# Altium PCB PCB2.PcbDoc
Units mm, origin at the board's own origin, x right, y up, seen from the top; angles counter-clockwise.
Board outline 72.14 x 54.61 mm, 2 copper layers (Top Layer, Bottom Layer); 36 components, 33 nets, 111 pads, 121 vias.
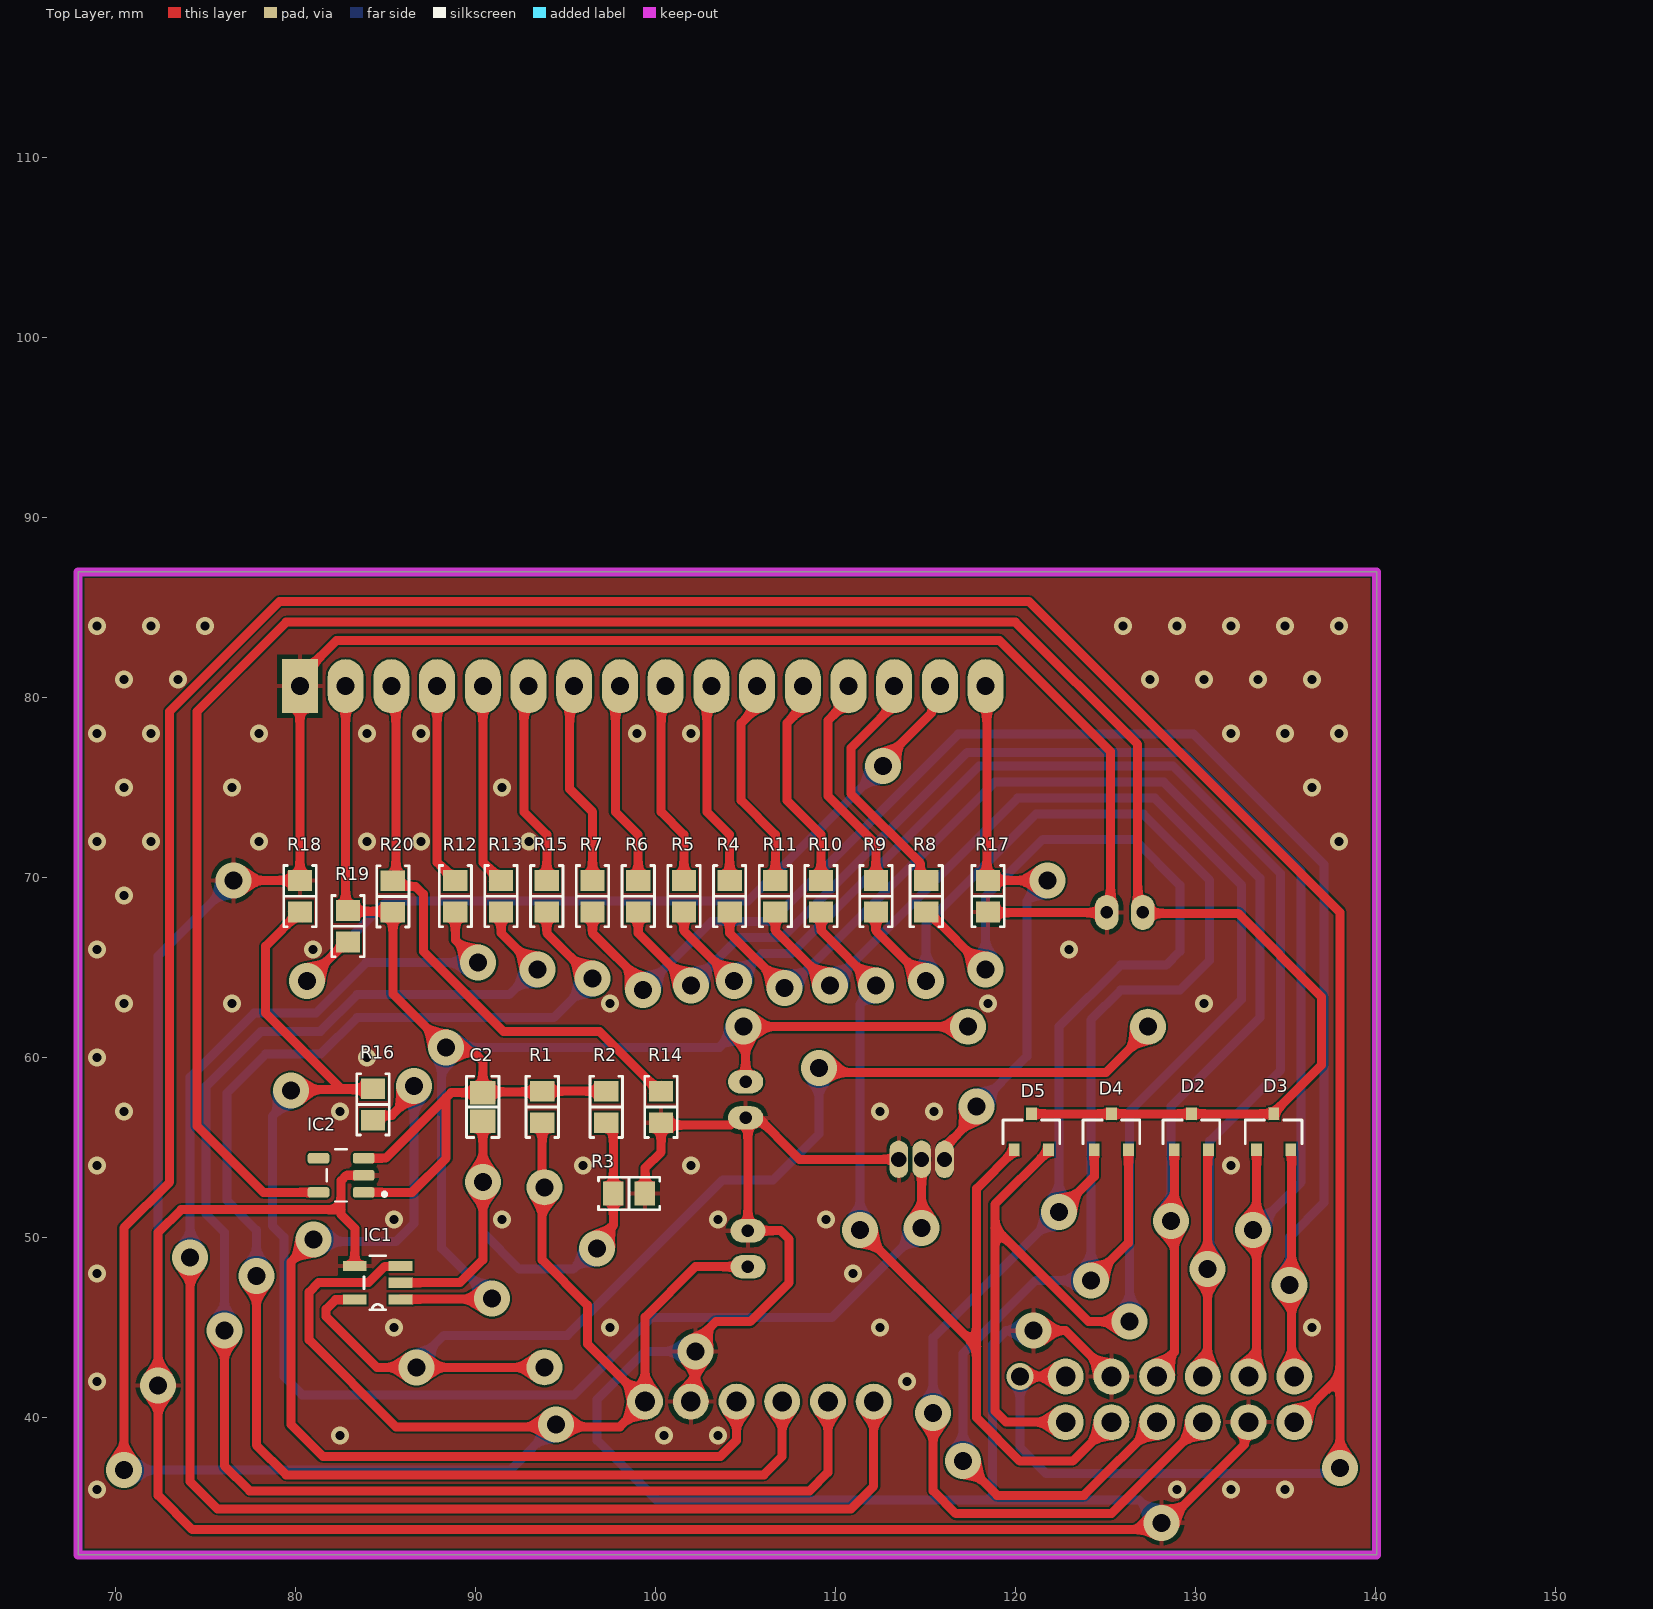
[diagram p0: Top Layer view]
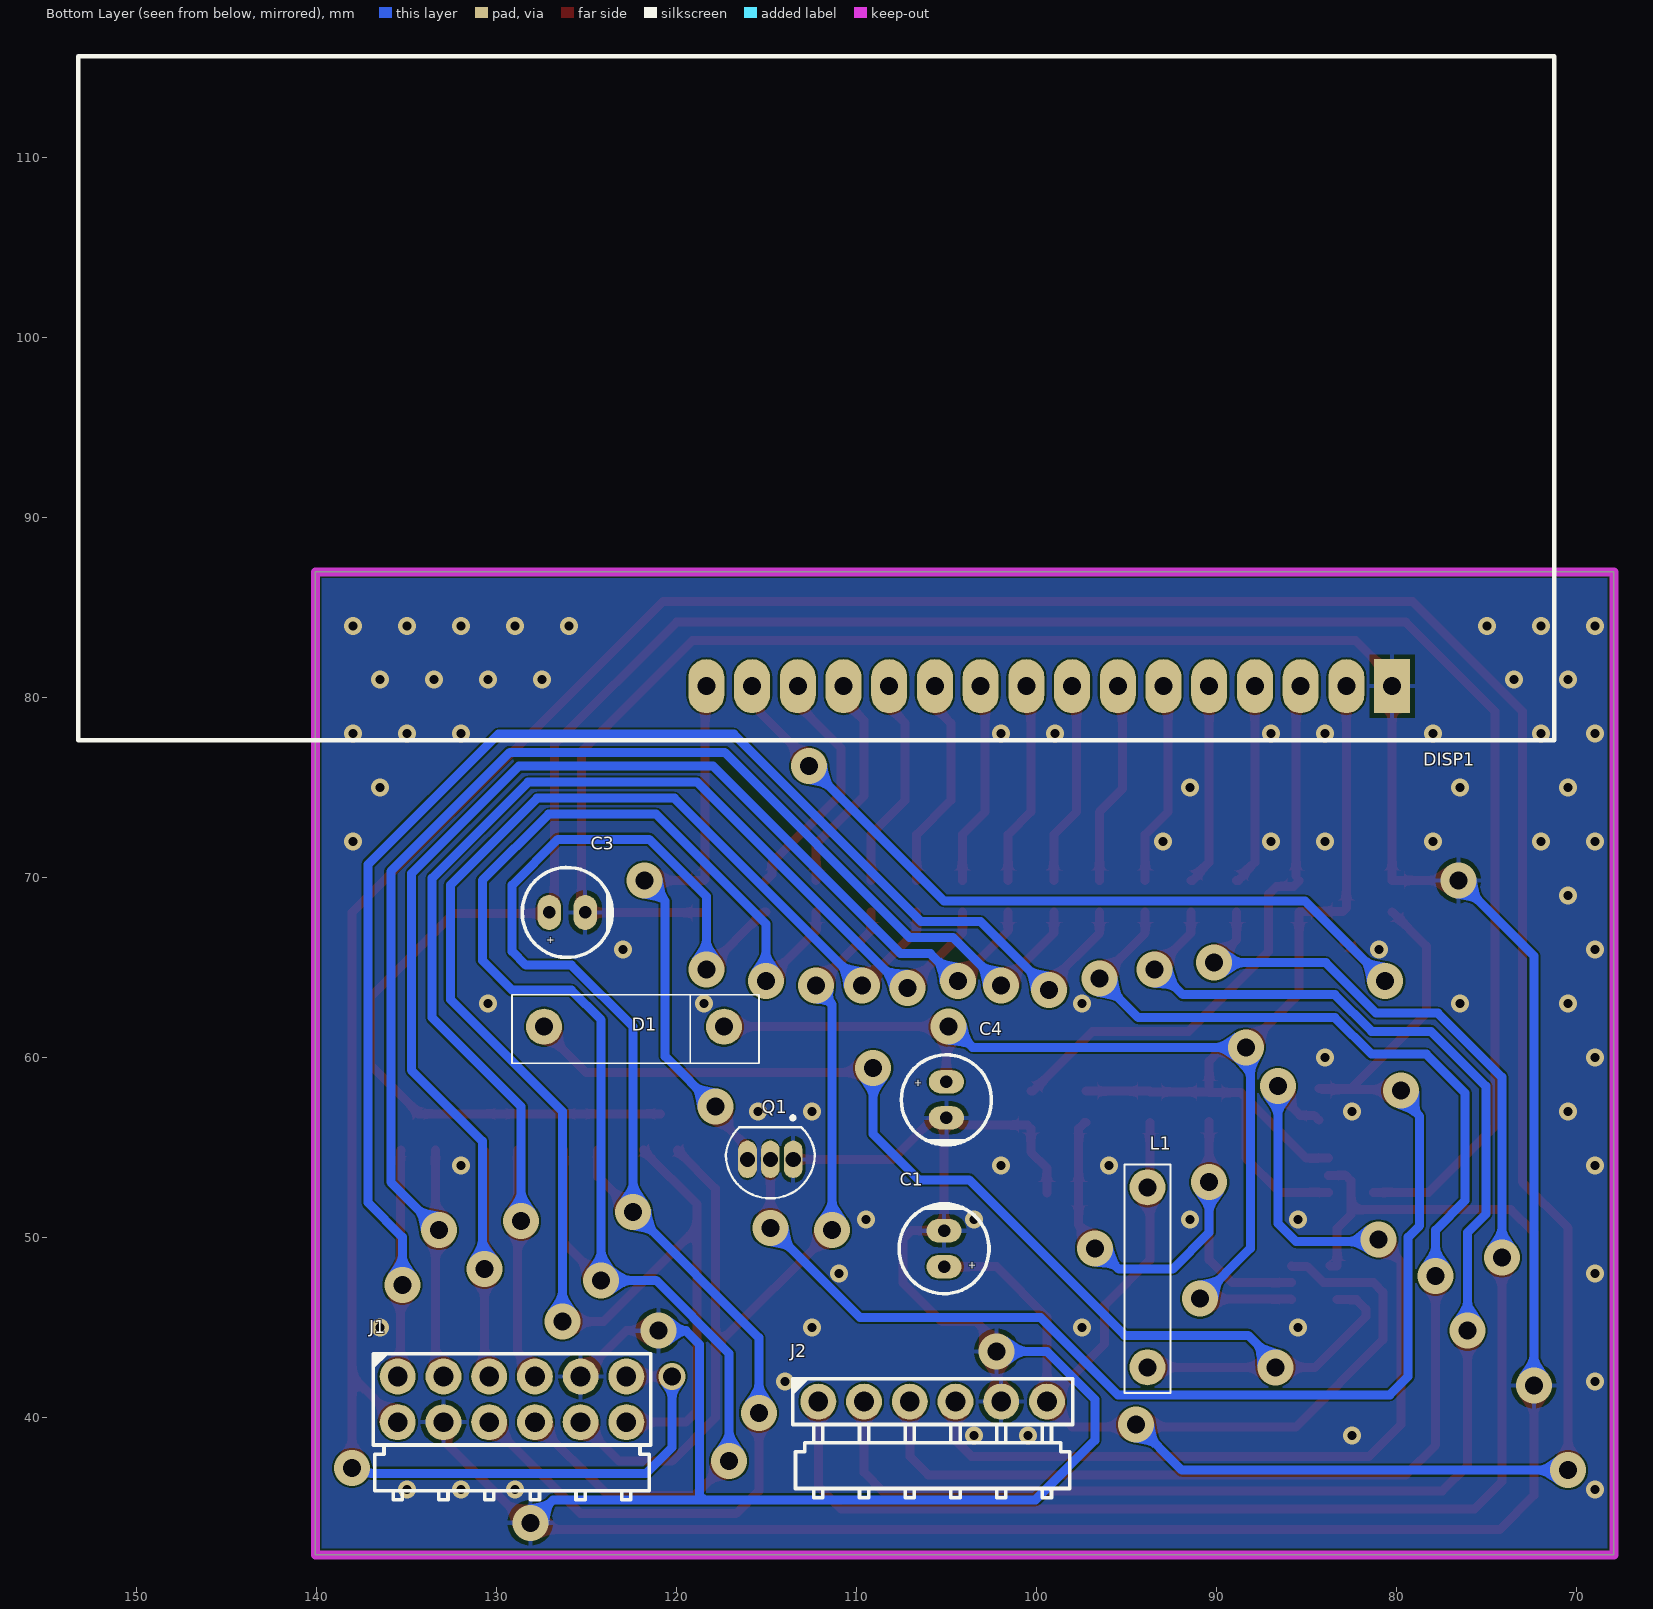
[diagram p1: Bottom Layer view, seen from below]
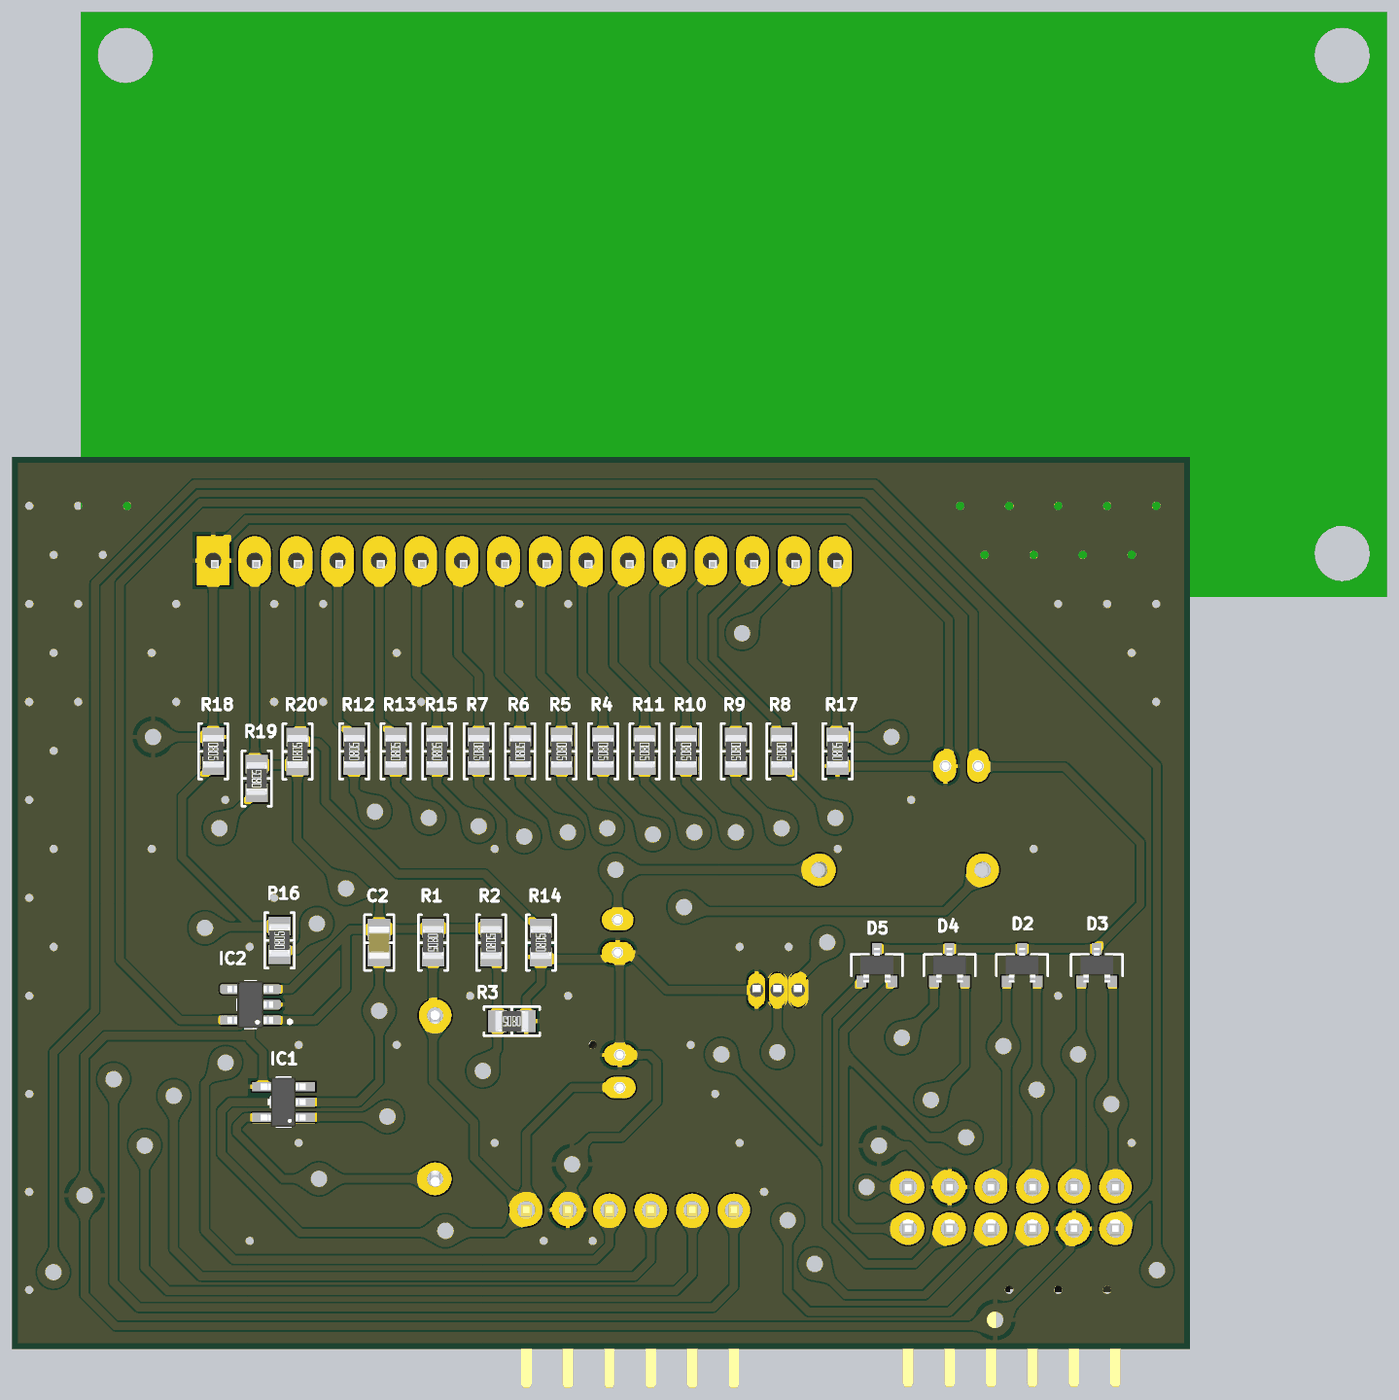
[diagram p2: 3D render of the assembled board from above, using the file's embedded part models]
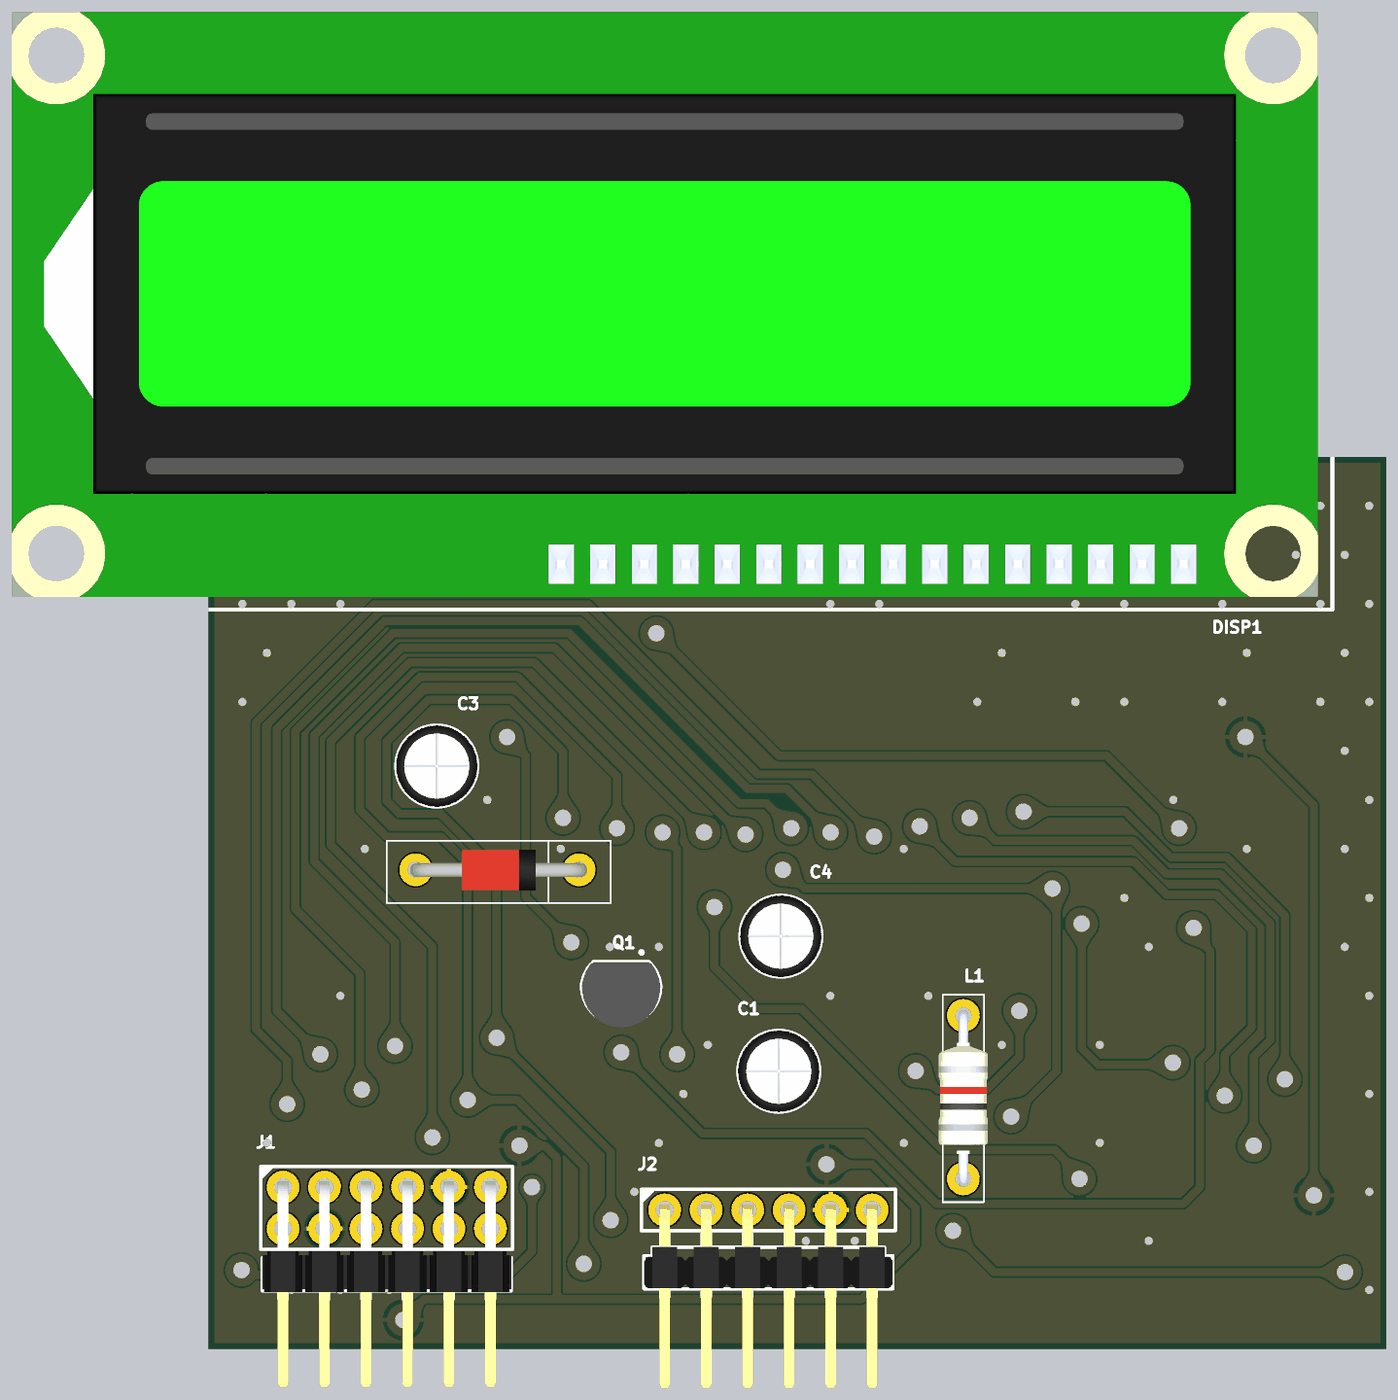
[diagram p3: 3D render of the assembled board from below, using the file's embedded part models]

## Layer stack, top to bottom
Top Solder: solder mask 0.0102, Solder Resist, Dk 3.5
Top Layer: signal copper 0.0356
Dielectric 1: dielectric 0.32, FR-4, Dk 4.8
Bottom Layer: signal copper 0.0356
Bottom Solder: solder mask 0.0102, Solder Resist, Dk 3.5

## Board outline
67.945,32.385 67.945,86.995 140.081,86.995 140.081,32.385

## Design rules (kind name [scope] priority, off if disabled: settings)
Clearance [All] p1: gap=0.1 ignorepadtopadclearanceinfootprint=FALSE
HoleToHoleClearance [All] p1: gap=0.1 allowstackedmicrovias=TRUE
MinimumSolderMaskSliver [All] p1: minsoldermaskwidth=0.067
PolygonConnect [All] p1: connectstyle=Relief reliefconductorwidth=0.254 reliefentries=4 polygonreliefangle="90 Angle" airgapwidth=0.254
RoutingVias [All] p1: holewidth=1 width=2 viastyle="Through Hole" minholewidth=0.5 minwidth=0.3 maxholewidth=1 maxwidth=2
SilkToSolderMaskClearance [IsPad] p1: minsilkscreentomaskgap=0.075 clearancetoexposedcopper=TRUE
SolderMaskExpansion [All] p1: expansion=0.102 istentingtop=FALSE
Width [All] p1: maxlimit=1 minlimit=0.254 preferedwidth=0.5
27 further rules are at their usual default settings.

## Components (designator, comment, footprint, x,y, rotation, side; value= is the part's Value field where it differs from the comment)
C1 "10µF" "CAP TH ALUM ELEC D5.00mm S2.00mm H11.00mm" 105.156,49.387 r270 bottom
C2 "12 pF" "CAP 0805_2012" 90.424,57.263 r90 top
C3 "4.7uF" "CAP TH ALUM ELEC D5.00mm S2.00mm H11.00mm" 126.095,68.072 r0 bottom value=10µF
C4 "4.7uF" "CAP TH ALUM ELEC D5.00mm S2.00mm H11.00mm" 105.029,57.658 r90 bottom value=10µF
D1 "ZenerD" ZENERD 127.381,61.722 r180 bottom
D2 "BAT54C" BAT54C 129.794,55.88 r0 top
D3 "BAT54C" BAT54C 134.366,55.88 r0 top
D4 "BAT54C" BAT54C 125.349,55.88 r0 top
D5 "BAT54C" BAT54C 120.904,55.88 r0 top
DISP1 "2x16_LCD" 2X16_LCD 80.264,80.645 r0 bottom
IC1 "NCP1406SNT1G" NCP1406SNT1G 84.582,47.498 r180 top
IC2 "LP2980IM5-3.3" LP2980IM5-3.3 82.55,53.467 r180 top
J1 "M20-9740646" "HARWIN M20-9740645" 129.159,41.021 r180 bottom
J2 "M20-9960645" "HARWIN M20-9960645" 105.791,40.894 r180 bottom
L1 "Inductor 10 uH" INDUCTOR 93.853,52.799 r270 bottom
Q1 "2N3904" 2N3904 114.808,54.356 r0 bottom
R1 "1 Ohms" "RES 0805_2012" 93.726,57.263 r270 top
R2 "620 kOhms" "RES 0805_2012" 97.282,57.263 r90 top
R3 "110 kOhms" "RES 0805_2012" 98.552,52.451 r180 top
R4 "200 Ohms" "RES 0805_2012" 104.14,68.975 r270 top
R5 "200 Ohms" "RES 0805_2012" 101.6,68.975 r270 top
R6 "200 Ohms" "RES 0805_2012" 99.06,68.975 r90 top
R7 "200 Ohms" "RES 0805_2012" 96.52,68.975 r270 top
R8 "200 Ohms" "RES 0805_2012" 115.062,68.975 r270 top
R9 "200 Ohms" "RES 0805_2012" 112.268,68.975 r270 top
R10 "200 Ohms" "RES 0805_2012" 109.22,68.975 r270 top
R11 "200 Ohms" "RES 0805_2012" 106.68,68.975 r270 top
R12 "100 Ohms" "RES 0805_2012" 88.9,68.975 r90 top
R13 "100 Ohms" "RES 0805_2012" 91.44,68.975 r90 top
R14 "100 Ohms" "RES 0805_2012" 100.33,57.263 r90 top
R15 "100 Ohms" "RES 0805_2012" 93.98,68.975 r90 top
R16 "2.2 kOhms" "RES 0805_2012" 84.328,57.404 r90 top
R17 "1 Ohms" "RES 0805_2012" 118.49,68.975 r90 top
R18 "10 kOhms" "RES 0805_2012" 80.264,68.975 r270 top
R19 "10 Ohms" "RES 0805_2012" 82.931,67.31 r90 top
R20 "2.1 kOhms" "RES 0805_2012" 85.428,68.961 r90 top

## Footprints (in the part's own frame and the unit in brackets; to place one, negate y for a bottom-side part, rotate by r counter-clockwise, add the part's x,y. Pads: shape width x height; smd on the part's side, far side on the other; paste and mask are expansions set on the pad)
2N3904 [mm]
  oval 1.04x2.08 hole 0.84: 1(-1.27,0) 2(0,0) 3(1.27,0)
  silkscreen extent -2.48,-2.4 2.48,2.16, body extent -2.4,-1.65 2.4,2.29, height 5.74
2X16_LCD [mm]
  rect 2x3 hole 1: 0(0,0)
  oval 2x3 hole 1: 1(2.54,0) 2(5.08,0) 3(7.62,0) 4(10.16,0) 5(12.7,0) 6(15.24,0) 7(17.78,0) 8(20.32,0) 9(22.86,0) 10(25.4,0) 11(27.94,0) 12(30.48,0) 13(33.02,0) 14(35.56,0) 15(38.1,0)
  silkscreen extent -9,-35 73,3, body extent -8.13,-33.59 71.87,2.21, height 12.4
BAT54C [mm]
  rect 0.6x0.7 smd: 0(-0.95,-1) 1(0.95,-1) 2(0,1)
  silkscreen extent -1.57,-0.65 1.57,0.66, body extent -1,-1.05 1,1.05, height 1.1
"CAP 0805_2012" [mm] "Chip Capacitor, 2-Leads, Body 2.00x1.20mm, IPC Medium Density"
  rect 1.3x1.4 smd: 1(-0.8,0) 2(0.8,0)
  silkscreen extent -1.7,-0.9 1.7,0.9, body extent -1,-0.64 1,0.64, height 1.26
"CAP TH ALUM ELEC D5.00mm S2.00mm H11.00mm" [mm] "5mm Diameter 2mm Lead Spacing Aluminum Electrolytic Capacitors Radial, Can"
  oval 1.3x1.95 hole 0.7: 1(1,0) 2(-1,0)
  silkscreen extent -2.5,-2.5 2.5,2.5, body extent -2.51,-2.5 2.5,2.5, height 11
"HARWIN M20-9740645" [mm] "2.54mm DIL PC TAIL PIN HEADER ASSEMBLY"
  round 2 hole 1.1: 1(-6.35,1.27) 2(-3.81,1.27) 3(-1.27,1.27) 4(1.27,1.27) 5(3.81,1.27) 6(6.35,1.27) 7(6.35,-1.27) 8(3.81,-1.27) 9(1.27,-1.27) 10(-1.27,-1.27) 11(-3.81,-1.27) 12(-6.35,-1.27)
  silkscreen extent -7.73,-5.59 7.71,2.57, body extent -7.62,-10.97 7.62,1.59, height 5
"HARWIN M20-9960645" [mm] "2.54mm DIL PC TAIL PIN HEADER ASSEMBLY"
  round 2 hole 1.1: 1(-6.35,0) 2(-3.81,0) 3(-1.27,0) 4(1.27,0) 5(3.81,0) 6(6.35,0)
  silkscreen extent -7.78,-5.33 7.78,1.3, body extent -7.62,-10.9 7.62,0.32, height 2.54
INDUCTOR [mm]
  round 2 hole 1: 0(0,0) 1(10,0)
  silkscreen extent -1.27,-1.27 11.43,1.27, body extent -0.32,-1.49 10.48,1.5, height 3
LP2980IM5-3.3 [mm]
  rrect50% 1.21x0.59 smd: 1(-1.255,0.95) 2(-1.255,0) 3(-1.255,-0.95) 4(1.255,-0.95) 5(1.255,0.95)
  silkscreen extent -2.51,-1.45 0.8,1.45, body extent -1.4,-1.45 1.4,1.45, height 1.45
NCP1406SNT1G [mil]
  rect 52x22 smd: 1(-50,37) 2(-50,0) 3(-50,-37) 4(50,-37) 5(50,37)
  silkscreen extent -17,-59 30,59, body extent -53,-59 55,59, height 43
"RES 0805_2012" [mm] "Chip Resistor, 2-Leads, Body 2.00x1.25mm, IPC Medium Density"
  rect 1.15x1.35 smd: 1(-0.875,0) 2(0.875,0)
  silkscreen extent -1.7,-0.9 1.7,0.9, body extent -1,-0.62 1,0.63, height 0.6
ZENERD [mm]
  round 2 hole 1: A(0,0) C(10,0)
  silkscreen extent -1.78,-2.03 11.94,1.78, body extent -0.35,-1.27 10.51,1.22, height 2.5

## Part data
C1: library part ECE-A1CN100U, "CAP ALUM 10UF 20% 16V RADIAL", Device Package="Radial, Can", Lifetime @ Temp.="2000 Hrs @ 85°C", Manufacturer="Panasonic Electronic Components", Operating Temperature="-40°C ~ 85°C", Ripple Current @ High Frequency="68mA @ 10kHz", Ripple Current @ Low Frequency="40mA @ 120Hz", Supplier Part Number 1=P1163-ND, Tolerance=±20%, Voltage - Rated=16V, Applications="General Purpose", Capacitance=10µF, ComponentLink1Description=Datasheet, ComponentLink1URL=http://industrial.panasonic.com/www-cgi/jvcr13pz.cgi?E+PZ+3+ABA0097+ECEA1CN100U+7+WW, componentlink2description="DigiKey Link", componentlink2url=http://digikey.com/product-detail/en/panasonic-electronic-components/ECE-A1CN100U/P1163-ND/227604, Height - Seated (Max)="0.433\" (11.00mm)", lastupdated="4.09.2020 23:28:57", Lead Spacing="0.079\" (2.00mm)", Lifecycle Status=Active, Minimum Order=1, Mounting Type="Through Hole", Package / Case="Radial, Can", Packaging=Bulk, Part Number=ECE-A1CN100U, Part Status=Active, partid=21486, Polarization=Bi-Polar, price=0.29, Series=SU, Size / Dimension="0.197\" Dia (5.00mm)", Supplier 1=DigiKey
C2: library part VJ0805A120FXJCW1BC, "CAP CER 12PF 16V C0G/NP0 0805", Device Package="0805 (2012 Metric)", Manufacturer="Vishay Vitramon", Operating Temperature="-55°C ~ 125°C", Supplier Part Number 1=720-VJ0805A120FXJCW1BCCT-ND, Temperature Coefficient="C0G, NP0", Tolerance=±1%, Voltage - Rated=16V, Applications="General Purpose", Capacitance="12 pF", ComponentLink1Description=Datasheet, ComponentLink1URL=https://www.vishay.com/docs/28548/vjw1bcbascomseries.pdf, componentlink2description="DigiKey Link", componentlink2url=https://www.digikey.com/en/products/detail/vishay-vitramon/VJ0805A120FXJCW1BC/8307136, lastupdated="19.09.2022 13:03:27", Lifecycle Status=Active, Minimum Order=1, Mounting Type="Surface Mount, MLCC", Package / Case="0805 (2012 Metric)", Packaging=TapeAndReel, Part Number=VJ0805A120FXJCW1BC, Part Status=Active, partid=31670, price=0.06, Series=VJ, Size / Dimension="0.079\" L x 0.049\" W (2.00mm x 1.25mm)", Supplier 1=DigiKey, Thickness (Max)="0.028\" (0.70mm)"
C3 C4: library part ECE-A1CN100U, "CAP ALUM 4.7UF 20% 16V RADIAL", Capacitance=4.7µF, Device Package="Radial, Can", Lifetime @ Temp.="2000 Hrs @ 85°C", Manufacturer="Panasonic Electronic Components", Operating Temperature="-40°C ~ 85°C", Ripple Current @ High Frequency="68mA @ 10kHz", Ripple Current @ Low Frequency="40mA @ 120Hz", Supplier Part Number 1=P1163-ND, Tolerance=±20%, Voltage - Rated=16V, Applications="General Purpose", ComponentLink1Description=Datasheet, ComponentLink1URL=http://industrial.panasonic.com/www-cgi/jvcr13pz.cgi?E+PZ+3+ABA0097+ECEA1CN100U+7+WW, componentlink2description="DigiKey Link", componentlink2url=http://digikey.com/product-detail/en/panasonic-electronic-components/ECE-A1CN100U/P1163-ND/227604, Height - Seated (Max)="0.433\" (11.00mm)", lastupdated="4.09.2020 23:28:57", Lead Spacing="0.079\" (2.00mm)", Lifecycle Status=Active, Minimum Order=1, Mounting Type="Through Hole", Package / Case="Radial, Can", Packaging=Bulk, Part Number=ECE-A1CN100U, Part Status=Active, partid=21486, Polarization=Bi-Polar, price=0.29, Series=SU, Size / Dimension="0.197\" Dia (5.00mm)", Supplier 1=DigiKey
J1: "CONN HEADER R/A 12POS 2.54MM", Current Rating (Amps)="3A per Contact", Manufacturer="Harwin Inc.", Material Flammability Rating="UL94 V-0", Operating Temperature="-40°C ~ 105°C", Supplier Part Number 1=M20-9740646-ND, Insulation Color=Black, ComponentLink1Description=Datasheet, ComponentLink1URL=https://cdn.harwin.com/pdfs/M20-974.pdf, componentlink2description="DigiKey Link", componentlink2url=http://digikey.com/product-detail/en/harwin-inc/M20-9740646/M20-9740646-ND/3920719, Connector Type="Header, Cuttable", Contact Finish - Mating=Tin, Contact Finish - Post=Tin, Contact Material=Brass, Contact Shape=Square, Contact Type="Male Pin", Fastening Type=Push-Pull, lastupdated="21.09.2022 19:18:29", Lifecycle Status=Active, Minimum Order=1500, Mounting Type="Through Hole, Right Angle", Number of Positions=12, Number of Positions Loaded=All, Number of Rows=2, Packaging=Bulk, Part Number=M20-9740646, Part Status=Active, partid=159, price=0.27, Series=M20, Shrouding=Unshrouded, Style="Board to Board or Cable", Supplier 1=DigiKey, Termination=Solder, Insulation Material="Polyamide (PA6T), Nylon 6T"
J2: "CONN HEADER R/A 6POS 2.54MM", Current Rating (Amps)="3A per Contact", Manufacturer="Harwin Inc.", Material Flammability Rating="UL94 V-0", Operating Temperature="-40°C ~ 105°C", Supplier Part Number 1=952-2247-ND, Insulation Color=Black, ComponentLink1Description=Datasheet, ComponentLink1URL=https://cdn.harwin.com/pdfs/Harwin_PC_Connectors_M20.pdf, componentlink2description="DigiKey Link", componentlink2url=https://www.digikey.com/en/products/detail/harwin-inc/M20-9960645/3728211, Connector Type="Header, Cuttable", Contact Finish - Mating=Gold, Contact Length - Mating="0.240\" (6.10mm)", Contact Length - Post="0.118\" (3.00mm)", Contact Material=Brass, Contact Shape=Square, Contact Type="Male Pin", Fastening Type=Push-Pull, lastupdated="21.09.2022 19:23:50", Lifecycle Status=Active, Minimum Order=1, Mounting Type="Through Hole, Right Angle", Number of Positions=6, Number of Positions Loaded=All, Number of Rows=1, Packaging=Bulk, Part Number=M20-9960645, Part Status=Active, partid=169, Pitch - Mating="0.100\" (2.54mm)", price=0.16, Row Spacing - Mating="-40°C ~ 105°C", Series=M20, Shrouding=Unshrouded, Style="Board to Board or Cable", Supplier 1=DigiKey, Termination=Solder, Insulation Height="0.100\" (2.54mm)", Insulation Material="Polyamide (PA6T), Nylon 6T"
L1: library part "Inductor 2.2 uH"
R1 R17: library part SG73S2ATTD1R0J, "RES 1 OHM 5% 1/4W 0805", Device Package="0805 (2012 Metric)", Manufacturer="KOA Speer Electronics, Inc.", Operating Temperature="-55°C ~ 155°C", Power (Watts)="0.25W, 1/4W", Ratings=AEC-Q200, Supplier Device Package=0805, Supplier Part Number 1=2019-SG73S2ATTD1R0JCT-ND, Temperature Coefficient=±200ppm/°C, Tolerance=±5%, ComponentLink1Description=Datasheet, ComponentLink1URL=http://www.koaspeer.com/catimages/Products/SG73S/SG73S.pdf, componentlink2description="DigiKey Link", componentlink2url=http://digikey.com/product-detail/en/koa-speer-electronics-inc/SG73S2ATTD1R0J/2019-SG73S2ATTD1R0JCT-ND/10280098, Composition="Thick Film", Features="Automotive AEC-Q200, Moisture Resistant, Pulse Withstanding", Height - Seated (Max)="0.024\" (0.60mm)", lastupdated="19.09.2022 13:35:46", Lifecycle Status=Active, Minimum Order=1, Number of Terminations=2, Package / Case="0805 (2012 Metric)", Packaging=TapeAndReel, Part Number=SG73S2ATTD1R0J, Part Status=Active, partid=46919, price=0.01, Resistance="1 Ohms", Series=SG73S, Size / Dimension="0.079\" L x 0.049\" W (2.00mm x 1.25mm)", Supplier 1=DigiKey
R2: library part ERJ-PB6B6203V, "RES SMD 620K OHM 0.1% 1/4W 0805", Device Package="0805 (2012 Metric)", Manufacturer="Panasonic Electronic Components", Operating Temperature="-55°C ~ 155°C", Power (Watts)="0.25W, 1/4W", Ratings=AEC-Q200, Supplier Device Package=0805, Supplier Part Number 1=P20913CT-ND, Temperature Coefficient=±50ppm/°C, Tolerance=±0.1%, ComponentLink1Description=Datasheet, ComponentLink1URL=https://industrial.panasonic.com/cdbs/www-data/pdf/RDM0000/AOA0000C328.pdf, componentlink2description="DigiKey Link", componentlink2url=https://www.digikey.com/en/products/detail/panasonic-electronic-components/ERJ-PB6B6203V/6213696, Composition="Thick Film", Features="Automotive AEC-Q200, Pulse Withstanding", Height - Seated (Max)="0.028\" (0.70mm)", lastupdated="19.09.2022 13:36:02", Lifecycle Status=Active, Minimum Order=1, Number of Terminations=2, Package / Case="0805 (2012 Metric)", Packaging=TapeAndReel, Part Number=ERJ-PB6B6203V, Part Status=Active, partid=43356, price=0.04, Resistance="620 kOhms", Series=ERJ-PB6, Size / Dimension="0.079\" L x 0.049\" W (2.00mm x 1.25mm)", Supplier 1=DigiKey
R3: library part RK73B2ATTD114J, "RES 110K OHM 5% 1/4W 0805", Device Package="0805 (2012 Metric)", Manufacturer="KOA Speer Electronics, Inc.", Operating Temperature="-55°C ~ 155°C", Power (Watts)="0.25W, 1/4W", Ratings=AEC-Q200, Supplier Device Package=0805, Supplier Part Number 1=2019-RK73B2ATTD114JCT-ND, Temperature Coefficient=±200ppm/°C, Tolerance=±5%, ComponentLink1Description=Datasheet, ComponentLink1URL=https://www.koaspeer.com/pdfs/RK73B.pdf, componentlink2description="DigiKey Link", componentlink2url=https://www.digikey.com/en/products/detail/koa-speer-electronics-inc/RK73B2ATTD114J/10232127, Composition="Thick Film", Features="Automotive AEC-Q200", Height - Seated (Max)="0.024\" (0.60mm)", lastupdated="19.09.2022 13:35:04", Lifecycle Status=Active, Minimum Order=1, Number of Terminations=2, Package / Case="0805 (2012 Metric)", Packaging=CutTape, Part Number=RK73B2ATTD114J, Part Status=Active, partid=66501, price=0.01, Resistance="110 kOhms", Series=RK73B, Size / Dimension="0.079\" L x 0.049\" W (2.00mm x 1.25mm)", Supplier 1=DigiKey
R4 R5 R6 R7 R8 R9 R10 R11: library part RK73B2ATTD201J, "RES 200 OHM 5% 1/4W 0805", Device Package="0805 (2012 Metric)", Manufacturer="KOA Speer Electronics, Inc.", Operating Temperature="-55°C ~ 155°C", Power (Watts)="0.25W, 1/4W", Ratings=AEC-Q200, Supplier Device Package=0805, Supplier Part Number 1=2019-RK73B2ATTD201JCT-ND, Temperature Coefficient=±200ppm/°C, Tolerance=±5%, ComponentLink1Description=Datasheet, ComponentLink1URL=http://www.koaspeer.com/catimages/Products/RK73B/RK73B.pdf, componentlink2description="DigiKey Link", componentlink2url=https://www.digikey.com/en/products/detail/koa-speer-electronics-inc/RK73B2ATTD201J/10236213, Composition="Thick Film", Features="Automotive AEC-Q200", Height - Seated (Max)="0.024\" (0.60mm)", lastupdated="19.09.2022 13:36:09", Lifecycle Status=Active, Minimum Order=1, Number of Terminations=2, Package / Case="0805 (2012 Metric)", Packaging=CutTape, Part Number=RK73B2ATTD201J, Part Status=Active, partid=41280, price=0.01, Resistance="200 Ohms", Series=RK73B, Size / Dimension="0.079\" L x 0.049\" W (2.00mm x 1.25mm)", Supplier 1=DigiKey
R12 R13 R14 R15: library part RK73B2ATTD101J, "RES 100 OHM 5% 1/4W 0805", Device Package="0805 (2012 Metric)", Manufacturer="KOA Speer Electronics, Inc.", Operating Temperature="-55°C ~ 155°C", Power (Watts)="0.25W, 1/4W", Ratings=AEC-Q200, Supplier Device Package=0805, Supplier Part Number 1=2019-RK73B2ATTD101JCT-ND, Temperature Coefficient=±200ppm/°C, Tolerance=±5%, ComponentLink1Description=Datasheet, ComponentLink1URL=http://www.koaspeer.com/catimages/Products/RK73B/RK73B.pdf, componentlink2description="DigiKey Link", componentlink2url=https://www.digikey.com/en/products/detail/koa-speer-electronics-inc/RK73B2ATTD101J/10236510, Composition="Thick Film", Features="Automotive AEC-Q200", Height - Seated (Max)="0.024\" (0.60mm)", lastupdated="19.09.2022 13:36:17", Lifecycle Status=Active, Minimum Order=1, Number of Terminations=2, Package / Case="0805 (2012 Metric)", Packaging=CutTape, Part Number=RK73B2ATTD101J, Part Status=Active, partid=39368, price=0.01, Resistance="100 Ohms", Series=RK73B, Size / Dimension="0.079\" L x 0.049\" W (2.00mm x 1.25mm)", Supplier 1=DigiKey
R16: library part RK73B2ATTD222J, "RES 2.2K OHM 5% 1/4W 0805", Device Package="0805 (2012 Metric)", Manufacturer="KOA Speer Electronics, Inc.", Operating Temperature="-55°C ~ 155°C", Power (Watts)="0.25W, 1/4W", Ratings=AEC-Q200, Supplier Device Package=0805, Supplier Part Number 1=2019-RK73B2ATTD222JCT-ND, Temperature Coefficient=±200ppm/°C, Tolerance=±5%, ComponentLink1Description=Datasheet, ComponentLink1URL=http://www.koaspeer.com/catimages/Products/RK73B/RK73B.pdf, componentlink2description="DigiKey Link", componentlink2url=https://www.digikey.com/en/products/detail/koa-speer-electronics-inc/RK73B2ATTD222J/10236493, Composition="Thick Film", Features="Automotive AEC-Q200", Height - Seated (Max)="0.024\" (0.60mm)", lastupdated="19.09.2022 13:36:01", Lifecycle Status=Active, Minimum Order=1, Number of Terminations=2, Package / Case="0805 (2012 Metric)", Packaging=CutTape, Part Number=RK73B2ATTD222J, Part Status=Active, partid=43692, price=0.01, Resistance="2.2 kOhms", Series=RK73B, Size / Dimension="0.079\" L x 0.049\" W (2.00mm x 1.25mm)", Supplier 1=DigiKey
R18: library part SG73S2ATTD1002F, "RES 10K OHM 1% 1/4W 0805", Device Package="0805 (2012 Metric)", Manufacturer="KOA Speer Electronics, Inc.", Operating Temperature="-55°C ~ 155°C", Power (Watts)="0.25W, 1/4W", Ratings=AEC-Q200, Supplier Device Package=0805, Supplier Part Number 1=2019-SG73S2ATTD1002FCT-ND, Temperature Coefficient=±200ppm/°C, Tolerance=±1%, ComponentLink1Description=Datasheet, ComponentLink1URL=http://www.koaspeer.com/catimages/Products/SG73S/SG73S.pdf, componentlink2description="DigiKey Link", componentlink2url=https://www.digikey.com/en/products/detail/koa-speer-electronics-inc/SG73S2ATTD1002F/10279926, Composition="Thick Film", Features="Automotive AEC-Q200, Moisture Resistant, Pulse Withstanding", Height - Seated (Max)="0.024\" (0.60mm)", lastupdated="19.09.2022 13:36:38", Lifecycle Status=Active, Minimum Order=1, Number of Terminations=2, Package / Case="0805 (2012 Metric)", Packaging=TapeAndReel, Part Number=SG73S2ATTD1002F, Part Status=Active, partid=33492, price=0.02, Resistance="10 kOhms", Series=SG73S, Size / Dimension="0.079\" L x 0.049\" W (2.00mm x 1.25mm)", Supplier 1=DigiKey
R19: library part RNCP0805FTD10R0, "RES 10 OHM 1% 1/4W 0805", Device Package="0805 (2012 Metric)", Manufacturer="Stackpole Electronics Inc", Operating Temperature="-55°C ~ 155°C", Power (Watts)="0.25W, 1/4W", Supplier Device Package=0805, Supplier Part Number 1=RNCP0805FTD10R0CT-ND, Temperature Coefficient=±100ppm/°C, Tolerance=±1%, ComponentLink1Description=Datasheet, ComponentLink1URL=https://www.seielect.com/catalog/sei-rncp.pdf, componentlink2description="DigiKey Link", componentlink2url=https://www.digikey.com/en/products/detail/stackpole-electronics-inc/RNCP0805FTD10R0/2240197, Composition="Thin Film", Features=Anti-Sulfur, Height - Seated (Max)="0.025\" (0.65mm)", lastupdated="19.09.2022 13:36:43", Lifecycle Status=Active, Minimum Order=1, Number of Terminations=2, Package / Case="0805 (2012 Metric)", Packaging=TapeAndReel, Part Number=RNCP0805FTD10R0, Part Status=Active, partid=32193, price=0.01, Resistance="10 Ohms", Series=RNCP, Size / Dimension="0.079\" L x 0.049\" W (2.00mm x 1.25mm)", Supplier 1=DigiKey
R20: library part RK73H2ATTD2101F, "RES 2.1K OHM 1% 1/4W 0805", Device Package="0805 (2012 Metric)", Manufacturer="KOA Speer Electronics, Inc.", Operating Temperature="-55°C ~ 155°C", Power (Watts)="0.25W, 1/4W", Ratings=AEC-Q200, Supplier Device Package=0805, Supplier Part Number 1=2019-RK73H2ATTD2101FCT-ND, Temperature Coefficient=±100ppm/°C, Tolerance=±1%, ComponentLink1Description=Datasheet, ComponentLink1URL=http://www.koaspeer.com/catimages/Products/RK73H/RK73H.pdf, componentlink2description="DigiKey Link", componentlink2url=https://www.digikey.com/en/products/detail/koa-speer-electronics-inc/RK73H2ATTD2101F/10234277, Composition="Thick Film", Features="Automotive AEC-Q200, Moisture Resistant", Height - Seated (Max)="0.024\" (0.60mm)", lastupdated="19.09.2022 13:35:45", Lifecycle Status=Active, Minimum Order=1, Number of Terminations=2, Package / Case="0805 (2012 Metric)", Packaging=CutTape, Part Number=RK73H2ATTD2101F, Part Status=Active, partid=47004, price=0.01, Resistance="2.1 kOhms", Series=RK73H, Size / Dimension="0.079\" L x 0.049\" W (2.00mm x 1.25mm)", Supplier 1=DigiKey

## Via types
v1: diameter 1, hole 0.5, Top Layer to Bottom Layer, tented both sides, 73 vias
v2: diameter 2, hole 1, Top Layer to Bottom Layer, tented both sides, 47 vias
v3: diameter 1.5, hole 1, Top Layer to Bottom Layer, tented both sides, 1 vias

## Nets (pads, with @x,y where several pads share a name; then routed paths per layer and width w, separated by ;. In a path a pad name is that pad's centre, name@x,y a point inside that pad or via, vN(x,y) a via of type N, cw(c..) or ccw(c..) an arc to the next point about the centre after c; other vN are vias at no path point)
DB0: DISP1.6 R7.1 | length 10.9
  Top Layer w0.5: DISP1.6@95.512,80.137 95.25,79.875 95.25,74.93 96.52,73.66 R7.1
DB1: DISP1.7 R6.2 | length 10.9
  Top Layer w0.5: DISP1.7@98.052,80.137 97.79,79.875 97.79,73.66 99.06,72.39 R6.2
DB2: DISP1.8 R5.1 | length 10.9
  Top Layer w0.5: DISP1.8@100.592,80.137 100.33,79.875 100.33,73.66 101.6,72.39 R5.1
DB3: DISP1.9 R4.1 | length 10.9
  Top Layer w0.5: DISP1.9@103.132,80.137 102.87,79.875 102.87,73.66 104.14,72.39 R4.1
DB4: DISP1.10 R11.1 | length 11.4
  Top Layer w0.5: DISP1.10@105.672,80.137 105.672,79.491 104.775,78.594 104.775,74.295 106.68,72.39 R11.1
DB5: DISP1.11 R10.1 | length 11.4
  Top Layer w0.5: DISP1.11@108.212,80.137 108.212,79.491 107.315,78.594 107.315,74.295 109.22,72.39 R10.1
DB6: DISP1.12 R9.1 | length 11.9
  Top Layer w0.5: DISP1.12@110.752,80.137 110.752,79.878 109.601,78.727 109.601,74.549 112.268,71.882 R9.1
DB7: DISP1.13 R8.1 | length 13
  Top Layer w0.5: DISP1.13@113.292,80.137 113.292,79.624 110.871,77.203 110.871,74.676 114.724,70.823 114.724,70.175 115.049,69.85 R8.1
Enable: DISP1.5 R15.2 | length 10.9
  Top Layer w0.5: DISP1.5@92.972,80.137 92.71,79.875 92.71,73.66 93.98,72.39 R15.2
GND: C1.2 C3.2 C4.2 DISP1.0 IC1.4 IC2.2 J1.5 J1.11 J2.5 Q1.1 R3.1 R14.1 R17.1 R18.1 | length 304.1
  Top Layer w0.5: v2(76.581,69.85) R18.1 80.264,80.129 DISP1.0@80.272,80.137 ; DISP1.0 80.264,81.145 82.304,83.185 119.126,83.185 125.307,77.004 125.307,68.019 125.267,68.059 118.53,68.059 R17.1 ; IC1.4@83.722,48.467 83.693,48.438 IC1.4 83.312,50.523 82.55,51.285 82.55,51.562 ; IC2.2 82.843,53.467 82.55,53.174 82.55,51.562 ; R3.1@99.447,52.471 99.447,53.876 100.33,54.759 100.33,56.063 100.528,56.261 104.176,56.261 104.823,56.908 C4.2@105.156,56.908 ; J2.5 102.235,41.148 v2(102.235,43.688) 102.235,44.196 103.378,45.339 105.283,45.339 107.442,47.498 107.442,49.911 106.966,50.387 C1.2 C4.2@105.156,56.908 ; Q1.1@113.538,54.876 Q1.1 108.021,54.356 105.468,56.908 C4.2@105.156,56.908 ; v2(121.031,44.831) 122.809,44.831 J1.5 ; v2@128.016,33.782 74.295,33.782 72.39,35.687 v2(72.39,41.783) 72.39,50.292 73.66,51.562 82.55,51.562 ; v2@128.27,34.036 132.74,38.506 132.74,39.522 J1.11
  Bottom Layer w0.5: v2(72.39,41.783) 72.39,65.659 v2(76.581,69.85) ; v2(102.235,43.688) 99.441,43.688 96.774,41.021 96.774,38.735 100.076,35.433 118.491,35.433 ; v2(121.031,44.831) 119.507,44.831 118.745,44.069 118.745,35.687 118.491,35.433 ; v2(128.143,34.163) 126.873,35.433 118.491,35.433
  other v1: 69,36 129,36 132,36 135,36 82.5,39 100.5,39 103.5,39 69,42 114,42 85.5,45 97.5,45 112.5,45 136.5,45 69,48 111,48 85.5,51 91.5,51 103.5,51 109.5,51 69,54 96,54 102,54 132,54 70.5,57 82.5,57 112.5,57 115.5,57 69,60 84,60 70.5,63 76.5,63 97.5,63 118.5,63 130.5,63 69,66 81,66 123,66 70.5,69 69,72 72,72 78,72 84,72 87,72 93,72 138,72 70.5,75 76.5,75 91.5,75 136.5,75 69,78 72,78 78,78 84,78 87,78 99,78 102,78 132,78 135,78 138,78 70.5,81 73.5,81 127.5,81 130.5,81 133.5,81 136.5,81 69,84 72,84 75,84 126,84 129,84 132,84 135,84 138,84
NetC2_1: C2.1 IC1.2 R2.1 R3.2 | length 30.8
  Top Layer w0.5: IC1.2 89.154,47.498 90.424,48.768 v2(90.424,53.086) C2.1 ; v2(96.774,49.403) 96.774,49.809 97.677,50.712 R3.2 97.677,56.063 97.352,56.388 R2.1
  Bottom Layer w0.5: v2(90.424,53.086) 90.424,50.292 92.456,48.26 95.442,48.26 96.585,49.403 v2(96.774,49.403)
NetC2_2: C2.2 C4.1 D1.C DISP1.1 IC1.1 IC2.1 IC2.3 R1.1 R2.2 R19.2 R20.1 | length 104.4
  Top Layer w0.5: DISP1.1@82.812,80.137 82.808,80.133 82.808,68.308 R19.2 82.98,68.135 85.379,68.135 R20.1 85.428,63.543 88.679,60.292 89.949,60.292 90.424,59.817 C2.2 ; IC2.1 86.492,52.517 88.392,54.417 88.392,57.785 ; IC2.3 85.024,54.417 88.392,57.785 ; IC1.1 85.877,46.584 90.907,46.584 v2(90.932,46.609) ; R2.2 R1.1 93.688,58.101 90.462,58.101 C2.2 ; C4.1@105.029,58.535 105.029,61.595 v2(104.902,61.722) D1.C@117.602,61.722 ; 88.392,57.785 88.67,58.063 C2.2
  Bottom Layer w0.5: v2(90.932,46.609) 88.138,49.403 88.138,60.325 v2(88.392,60.579) 103.57,60.579 104.713,61.722 v2(104.902,61.722)
NetD1_A: D1.A IC1.5 L1.1 | length 66.8
  Top Layer w0.5: IC1.5 82.245,46.558 81.718,46.031 81.718,45.617 84.535,42.799 v2(86.741,42.799) L1.1 ; v2(109.093,59.436) 109.347,59.182 125.062,59.182 D1.A@127.602,61.722
  Bottom Layer w0.5: v2(86.741,42.799) 86.741,43.053 88.265,44.577 95.123,44.577 103.759,53.213 106.553,53.213 109.093,55.753 v2(109.093,59.436) ; L1.1@93.949,43.084 L1.1@94.043,43.084
NetD2_0: D2.0 J1.4 R4.2 | length 72.9
  Top Layer w0.5: R4.2 104.14,66.929 v2(107.188,63.881) ; J1.4 127.889,42.697 128.844,43.652 D2.0
  Bottom Layer w0.5: v2(107.188,63.881) 107.442,63.881 118.872,75.311 128.27,75.311 133.604,69.977 133.604,62.23 128.651,57.277 v2(128.651,50.927)
NetD2_1: D2.1 J1.3 R5.2 | length 79.2
  Top Layer w0.5: R5.2 101.6,67.056 v2(104.394,64.262) ; J1.3 130.694,42.556 130.694,54.83 D2.1 D2.1@130.744,54.83
  Bottom Layer w0.5: v2(104.394,64.262) 105.918,65.786 107.569,65.786 117.983,76.2 128.778,76.2 134.747,70.231 134.747,59.309 130.81,55.372 130.81,48.387 v2(130.683,48.26)
NetD3_0: D3.0 J1.2 R6.1 | length 81.1
  Top Layer w0.5: R6.1 99.06,66.929 v2(101.981,64.008) ; J1.2 132.969,42.697 133.416,43.144 D3.0
  Bottom Layer w0.5: v2(101.981,64.008) 104.648,66.675 107.065,66.675 117.352,76.962 129.286,76.962 135.89,70.358 135.89,53.086 v2(133.223,50.419)
NetD3_1: D3.1 J1.1 R7.2 | length 89.1
  Top Layer w0.5: R7.2 96.52,66.929 99.314,64.135 v2(99.314,63.754) ; D3.1@135.316,54.83 D3.1 135.366,54.83 135.366,42.434 J1.1
  Bottom Layer w0.5: v2(99.314,63.754) 103.124,67.564 106.426,67.564 116.84,77.978 129.921,77.978 137.16,70.739 137.16,51.943 135.255,50.038 v2(135.255,47.371)
NetD4_0: D4.0 J1.10 R8.2 | length 84.6
  Top Layer w0.5: R8.2 115.162,68.1 v2(118.364,64.897) ; v2(115.443,40.259) 115.443,35.941 116.713,34.671 125.349,34.671 J1.10 ; v2(122.428,51.435) 124.399,53.406 D4.0
  Bottom Layer w0.5: v2(115.443,40.259) 115.443,44.45 v2(122.428,51.435) 122.428,61.722 125.857,65.151 128.397,65.151 129.159,65.913 129.159,69.596 126.619,72.136 121.539,72.136 118.364,68.961 v2(118.364,64.897)
NetD4_1: D4.1 J1.9 R9.2 | length 91
  Top Layer w0.5: R9.2 112.268,67.056 v2(115.062,64.262) ; v2(117.094,37.592) 118.999,35.687 123.825,35.687 J1.9 ; v2(124.206,47.625) 126.299,49.718 D4.1
  Bottom Layer w0.5: v2(115.062,64.262) 115.062,67.437 121.158,73.533 127.127,73.533 130.81,69.85 130.81,65.405 129.159,63.754 125.857,63.754 124.206,62.103 v2(124.206,47.625) 121.158,47.625 117.094,43.561 v2(117.094,37.592)
NetD5_0: D5.0 J1.8 R10.2 | length 53.6
  Top Layer w0.5: R10.2 109.22,67.056 v2(112.268,64.008) ; v2(111.379,50.419) 117.856,43.942 ; D5.0 119.954,54.83 117.856,52.732 117.856,43.942 ; J1.8 123.19,37.592 120.269,37.592 117.856,40.005 117.856,43.942
  Bottom Layer w0.5: v2(111.379,50.419) 111.379,62.965 112.268,63.854 v2(112.268,64.008)
NetD5_1: D5.1 J1.7 R11.2 | length 90.9
  Top Layer w0.5: R11.2 106.68,67.056 v2(109.728,64.008) ; D5.1 121.804,54.83 121.804,54.78 118.872,51.848 118.872,50.546 ; J1.7 119.507,39.751 118.872,40.386 118.872,50.546 ; v2(126.365,45.339) 124.079,45.339 118.872,50.546
  Bottom Layer w0.5: v2(109.728,64.008) 120.142,74.422 127.762,74.422 132.588,69.596 132.588,63.246 126.365,57.023 v2(126.365,45.339)
NetDISP1_14: DISP1.14 R19.1 | length 45.4
  Top Layer w0.5: v2(80.645,64.262) 80.658,64.262 82.831,66.435 R19.1 ; v2(112.649,76.2) 112.649,76.454 115.345,79.15 115.345,79.26 115.832,79.747 DISP1.14@115.832,80.137
  Bottom Layer w0.5: v2(80.645,64.262) 85.09,68.707 105.156,68.707 v2(112.649,76.2)
NetDISP1_15: DISP1.15 Q1.3 R17.2 | length 31.5
  Top Layer w0.5: Q1.3 116.078,55.022 117.569,56.513 117.569,56.99 v2(117.856,57.277) ; DISP1.15@118.372,80.137 118.431,80.078 118.431,69.909 R17.2 v2(121.793,69.85)
  Bottom Layer w0.5: v2(117.856,57.277) 120.65,60.071 120.65,68.707 v2(121.793,69.85)
NetJ2_1: J2.1 R12.1 | length 88.3
  Top Layer w0.5: v2(74.168,48.895) 74.168,36.449 75.692,34.925 110.871,34.925 112.141,36.195 J2.1 ; R12.1 88.9,66.548 v2(90.17,65.278)
  Bottom Layer w0.5: v2(74.168,48.895) 74.168,58.928 77.724,62.484 81.153,62.484 83.947,65.278 v2(90.17,65.278)
NetJ2_2: J2.2 R13.1 | length 85.2
  Top Layer w0.5: v2(76.073,44.831) 76.073,37.338 77.47,35.941 108.585,35.941 109.601,36.957 J2.2 ; R13.1 91.44,66.929 v2(93.472,64.897)
  Bottom Layer w0.5: v2(76.073,44.831) 76.073,50.292 75.057,51.308 75.057,58.42 78.105,61.468 81.407,61.468 83.439,63.5 91.886,63.5 v2@93.283,64.897 ; v2@93.246,64.671 v2(93.472,64.897)
NetJ2_3: J2.3 R15.1 | length 81.3
  Top Layer w0.5: v2(77.851,47.879) 77.851,38.481 79.502,36.83 106.045,36.83 107.061,37.846 J2.3 ; R15.1 93.98,66.929 v2(96.52,64.389)
  Bottom Layer w0.5: v2(77.851,47.879) 77.851,50.419 76.2,52.07 76.2,58.039 78.359,60.198 81.407,60.198 83.439,62.23 94.361,62.23 v2(96.52,64.389)
NetJ2_4: J2.4 R16.1 | length 55.8
  Top Layer w0.5: v2(81.026,49.911) 79.756,48.641 79.756,39.624 81.534,37.846 103.632,37.846 104.521,38.735 J2.4 ; R16.1 84.595,56.796 85.371,56.796 86.614,58.039 v2(86.614,58.42)
  Bottom Layer w0.5: v2(81.026,49.911) 81.153,49.784 85.598,49.784 86.614,50.8 v2(86.614,58.42)
NetQ1_2: Q1.2 R16.2 R18.2 | length 79.1
  Top Layer w0.5: v2(79.756,58.166) 79.812,58.222 84.172,58.222 R16.2@84.228,58.279 ; R18.2 78.359,66.195 78.359,62.484 82.564,58.279 R16.2@84.228,58.279 ; R16.2 R16.2@84.228,58.279 ; v2(114.808,50.546) Q1.2
  Bottom Layer w0.5: v2@79.469,57.879 v2(79.756,58.166) 79.756,57.76 78.74,56.744 78.74,50.673 79.375,50.038 79.375,42.291 80.391,41.275 95.504,41.275 99.805,45.576 109.838,45.576 v2(114.808,50.546)
R/W: DISP1.4 R13.2 | length 10.8
  Top Layer w0.5: DISP1.4@90.432,80.137 90.432,70.858 91.015,70.275 91.015,70.175 91.34,69.85 R13.2
RS: DISP1.3 R12.2 | length 10.8
  Top Layer w0.5: DISP1.3@87.892,80.137 87.892,70.858 88.475,70.275 88.475,70.175 88.8,69.85 R12.2
VCC: C1.1 IC1.3 J1.6 J1.12 J2.6 L1.0 R1.2 | length 261.4
  Top Layer w0.5: v2(70.485,37.084) 70.485,50.546 73.025,53.086 73.025,79.248 79.121,85.344 120.777,85.344 138.049,68.072 138.049,42.291 ; IC1.3 85.823,48.408 84.984,48.408 84.074,47.498 81.295,47.498 80.772,46.975 80.772,44.323 85.598,39.497 94.488,39.497 98.044,39.497 J2.6 ; R1.2 93.726,53.815 93.726,50.8 93.726,48.768 96.234,46.26 96.234,44.101 J2.6 ; C1.1 102.235,48.387 99.441,45.593 J2.6 ; v3(120.269,42.291) J1.6 ; J1.12 138.049,42.291 ; v2(138.049,37.211) 138.049,42.291
  Bottom Layer w0.5: v2(70.485,37.084) 91.948,37.084 v2(94.488,39.624) ; v3(120.269,42.291) 120.269,38.354 121.713,36.91 137.006,36.91 137.02,36.924 137.762,36.924 v2(138.049,37.211)
VEE: DISP1.2 R14.2 R20.2 | length 31.7
  Top Layer w0.5: DISP1.2@85.352,80.137 85.602,79.887 R20.2@85.602,70.1 ; R20.2 85.753,69.511 86.699,69.511 87.122,69.088 87.122,65.913 91.567,61.468 96.9,61.468 100.23,58.138 R14.2
VTERM2V5: C3.1 D2.2 D3.2 D4.2 D5.2 IC2.5 | length 131
  Top Layer w0.5: IC2.5 78.232,52.517 74.549,56.2 74.549,79.248 79.502,84.201 120.015,84.201 126.807,77.409 126.807,68.019 132.387,68.019 137.033,63.373 137.033,59.597 134.366,56.93 D3.2 D2.2 D4.2 D5.2
pads on no net: IC2.4

## Polygon pours and split planes (outlines as drawn)
GND on Bottom Layer "GND_L02_P000" (solid, remove dead copper, pour order 0): 68.072,86.995 68.199,86.868 139.827,86.868 139.827,32.766 139.7,32.639 68.326,32.639 68.072,32.893
GND on Top Layer "GND_L01_P001" (solid, remove dead copper, pour order 1): 68.072,86.995 68.199,86.868 139.827,86.868 139.827,32.766 139.7,32.639 68.326,32.639 68.072,32.893

## Keep-outs
Keep-Out Layer:
  lines w0.5: 67.945,32.385 140.081,32.385 140.081,86.995 67.945,86.995 67.945,33.274 67.945,32.385

## Text inside footprints (layer, text, board x,y; h text height)
C1: Bottom Overlay "+" at 103.906,48.687 h0.7 r90
C3: Bottom Overlay "+" at 126.795,66.822 h0.7 r180
C4: Bottom Overlay "+" at 106.279,58.358 h0.7 r270